# Altium PCB PCI_ASTROPIX_carrier_Bondplan.PcbDoc (part 2 of 2)
Units mm, origin at the board's own origin, x right, y up, seen from the top; angles counter-clockwise.
Board outline 51.3 x 59.63 mm, 4 copper layers (Top Layer, gnd, HV_vss, Bottom Layer); 70 components, 63 nets, 532 pads, 96 vias.
Unrouted connection lines stored in the file: 4.
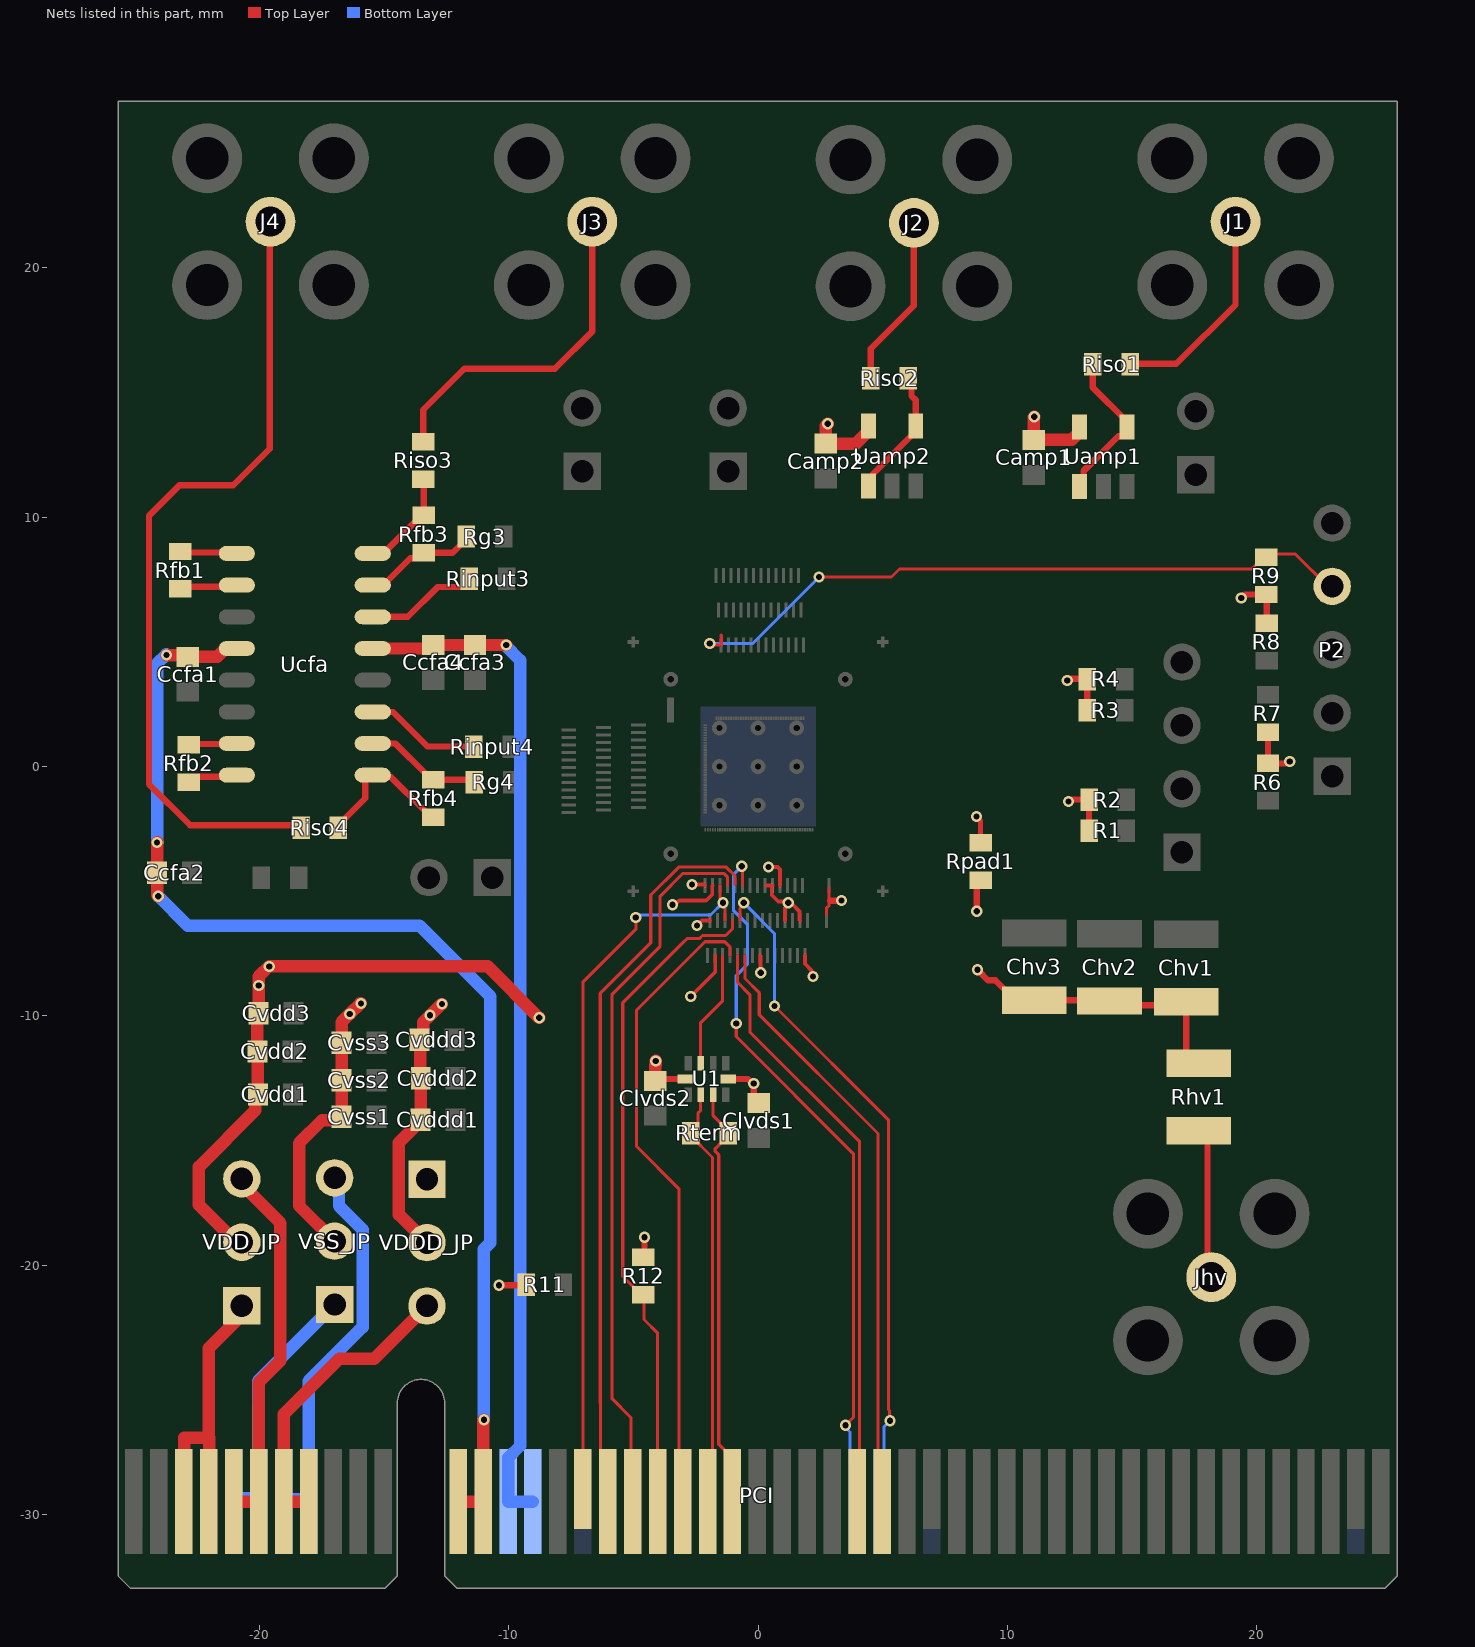
[diagram p4: the nets of this part, all layers, seen from the top]

## Via types
v1: diameter 0.45, hole 0.25, Top Layer to Bottom Layer, 90 vias
v2: diameter 3.1, hole 3.1, Top Layer to Bottom Layer, 4 vias
v3: diameter 2, hole 2, Top Layer to Bottom Layer, 2 vias

## Nets (pads, with @x,y where several pads share a name; then routed paths per layer and width w, separated by ;. In a path a pad name is that pad's centre, name@x,y a point inside that pad or via, vN(x,y) a via of type N, cw(c..) or ccw(c..) an arc to the next point about the centre after c; other vN are vias at no path point) (continued)
NetAstropix_chip_114: P2.4 R9.1 | length 27.9
  Top Layer w0.125: v1(-1.937,4.93) -1.772,4.93 -1.712,4.87 -1.48,4.87 ; -1.475,4.85 -1.475,5.275 ; v1(2.45,7.6) 5.35,7.6 5.675,7.925 19.8,7.925 R9.1@20.3,8.425 ; R9.1@20.35,8.425 20.45,8.525 21.55,8.525 22.85,7.225 P2.4@23.025,7.225
  Bottom Layer w0.125: v1@-1.925,4.975 -1.88,4.93 -0.22,4.93 v1(2.45,7.6)
NetAstropix_chip_201: Rpad1.2 | length 1.1
  Top Layer w0.125: v1(8.765,-2.007) 8.925,-2.167
  Top Layer w0.2: Rpad1.2@8.925,-3.05 8.925,-2.167
NetJ1_1: J1.1 Riso1.2 | length 8.5
  Top Layer w0.254: Riso1.2@14.925,16.125 14.95,16.15 16.775,16.15 19.15,18.525 19.15,21.75 J1.1@19.15,21.85
NetJ2_1: J2.1 Riso2.2 | length 6.7
  Top Layer w0.254: Riso2.2@4.525,15.575 4.525,16.75 6.25,18.475 6.25,21.225 J2.1@6.475,21.45
NetJ3_1: J3.1 Riso3.2 | length 13.7
  Top Layer w0.25: Riso3.2@-13.425,13.025 -13.425,14.3 -11.775,15.95 -8.146,15.95 -6.65,17.446 J3.1@-6.65,21.775
NetJ4_1: J4.1 Riso4.2 | length 32.8
  Top Layer w0.254: J4.1@-19.575,21.975 -19.575,12.75 -21.05,11.275 -23.2,11.275 -24.425,10.05 -24.425,-0.7 -22.775,-2.35 -18.425,-2.35 Riso4.2@-18.325,-2.45
NetJhv_1: Jhv.1 Rhv1.2 | length 6.2
  Top Layer w0.254: Rhv1.2@17.702,-14.55 Rhv1.2@18.063,-14.911 ; Rhv1.2@17.727,-14.6 Rhv1.2@17.675,-14.6 18.025,-14.95 Jhv.1@18.025,-20.1
NetRfb1_1: Rfb1.1 Ucfa.1 | length 2.2
  Top Layer w0.25: Rfb1.1@-23.175,8.625 -23.135,8.585 -21.21,8.585 Ucfa.1@-21.05,8.425
NetRfb1_2: Rfb1.2 Ucfa.2 | length 2.3
  Top Layer w0.25: Rfb1.2@-23.175,7.125 -23.092,7.208 -20.967,7.208 Ucfa.2@-20.9,7.275
NetRfb2_1: Rfb2.1 Ucfa.8 | length 2
  Top Layer w0.25: Rfb2.1@-22.825,-0.625 -22.612,-0.412 -20.912,-0.412 Ucfa.8@-20.9,-0.4
NetRfb2_2: Rfb2.2 Ucfa.7 | length 1.8
  Top Layer w0.25: Rfb2.2@-22.825,0.875 -22.8,0.9 -21.075,0.9 Ucfa.7@-21.025,0.95
NetRfb3_1: Rfb3.1 Rg3.2 Ucfa.15 | length 4.7
  Top Layer w0.25: Ucfa.15@-15.45,7.275 -15.025,7.275 -13.95,8.35 -13.7,8.35 Rfb3.1@-13.425,8.625 ; Rfb3.1@-13.4,8.575 -12.25,8.575 -11.675,9.15 Rg3.2@-11.675,9.325
NetRfb3_2: Rfb3.2 Riso3.1 Ucfa.16 | length 4.2
  Top Layer w0.25: Ucfa.16@-15.45,8.545 -15.03,8.545 -13.475,10.1 Rfb3.2@-13.4,10.1 ; Riso3.1@-13.425,11.575 -13.4,11.55 Rfb3.2@-13.4,10.1 ; Rfb3.2@-13.4,10.075 Rfb3.2@-13.4,10.1
NetRfb4_1: Rfb4.1 Riso4.1 Ucfa.9 | length 5.9
  Top Layer w0.25: Riso4.1@-16.825,-2.45 -16.825,-2.35 -15.75,-1.275 -15.75,-0.507 -15.618,-0.375 Ucfa.9@-15.45,-0.375 ; Ucfa.9@-15.45,-0.345 -15.383,-0.412 -14.738,-0.412 -13.35,-1.8 -13.125,-2.025 Rfb4.1@-13.025,-2.025
NetRfb4_2: Rfb4.2 Rg4.2 Ucfa.10 | length 4.7
  Top Layer w0.25: Ucfa.10@-15.45,0.925 -14.55,0.925 -13.35,-0.275 -13.35,-0.3 -13.125,-0.525 Rfb4.2@-13.1,-0.525 ; Rfb4.2@-13.025,-0.525 -11.425,-0.525 Rg4.2@-11.35,-0.6
NetRinput3_2: Rinput3.2 Ucfa.14 | length 4.6
  Top Layer w0.25: Ucfa.14@-15.45,6.005 -14.045,6.005 -12.85,7.2 -11.8,7.2 -11.525,7.475 Rinput3.2@-11.525,7.575
NetRinput4_2: Rinput4.2 Ucfa.11 | length 4.6
  Top Layer w0.25: Ucfa.11@-15.45,2.195 -15.439,2.184 -14.634,2.184 -13.25,0.8 Rinput4.2@-11.4,0.8
NetRiso1_1: Riso1.1 Uamp1.1 Uamp1.4 | length 6.6
  Top Layer w0.254: Uamp1.1@12.9,11.225 13.051,11.376 13.051,11.851 14.452,13.252 14.627,13.252 14.9,13.525 Uamp1.4@14.9,13.7 ; Riso1.1@13.475,16.225 13.425,16.175 Riso1.1@13.425,16.125 13.425,15.2 14.8,13.825 Uamp1.4@14.8,13.625
NetRiso2_1: Riso2.1 Uamp2.1 Uamp2.4 | length 5.5
  Top Layer w0.254: Uamp2.1@4.45,10.975 4.598,11.123 4.598,11.723 6.325,13.45 Uamp2.4@6.325,13.65 6.325,14.7 6.152,14.873 6.152,15.348 Riso2.1@5.925,15.575
POW4: PCI.B5 PCI.B6 VDD_JP.3 | length 14.6
  Top Layer w0.5: PCI.B5@-21,-29.475 PCI.B6@-20.025,-29.475 ; VDD_JP.3@-20.575,-16.775 -20.575,-16.885 -19.15,-18.31 -19.15,-23.825 -20.025,-24.7 PCI.B6@-20.025,-29.446
POW5: PCI.A7 PCI.A8 VSS_JP.3 | length 15.3
  Bottom Layer w0.5: PCI.A7@-19.025,-29.475 -18.925,-29.375 PCI.A8@-18.025,-29.375 ; PCI.A8@-17.975,-29.375 PCI.A8@-18.025,-29.375 ; VSS_JP.3@-16.979,-16.492 -16.803,-16.668 -16.803,-17.617 -15.854,-18.566 -15.854,-22.477 -18.025,-24.648 PCI.A8@-18.025,-29.375
POW6: PCI.B7 PCI.B8 VDDD_JP.3 | length 12
  Top Layer w0.5: PCI.B7@-19.025,-29.475 -18.075,-29.475 PCI.B8@-18.025,-29.425 ; PCI.B7@-19.015,-29.456 -19.015,-25.965 -16.8,-23.75 -15.395,-23.75 VDDD_JP.3@-13.275,-21.63
res_n: PCI.B17 | length 29.2
  Top Layer w0.125: PCI.B17@-7.025,-29.025 -7.025,-8.65 -4.9,-6.525 v1(-4.9,-6.05) ; v1@-1.52,-5.494 -1.325,-5.689 -1.325,-6.175 ; v1@-1.52,-5.465 v1@-1.52,-5.427 ; -1.52,-4.77 v1@-1.52,-5.427 ; v1(-1.4,-5.461) -1.434,-5.427 v1@-1.52,-5.427
  Bottom Layer w0.125: v1(-4.9,-6.05) -4.812,-6.05 -4.712,-5.95 -1.903,-5.95 -1.414,-5.461 v1(-1.4,-5.461)
SAMPLE_CLK: U1.8 | length 4.6
  Top Layer w0.125: U1.8@-2.3,-11.85 -2.3,-10.275 -1.42,-9.395 -1.42,-7.57
SAMPLE_CLK_N: PCI.B23 Rterm.1 U1.3 | length 17.1
  Top Layer w0.1: PCI.B23@-1.025,-29.475 PCI.B23@-1.025,-27.725
  Top Layer w0.125: U1.3@-1.8,-13.16 -1.8,-14 -1.2,-14.6 Rterm.1@-1.2,-14.7 -1.2,-14.8 -1.721,-15.321 -1.721,-15.425 -1.575,-15.571 -1.575,-27.175 PCI.B23@-1.025,-27.725
SAMPLE_CLK_P: PCI.B22 Rterm.2 U1.2 | length 17.4
  Top Layer w0.1: U1.2@-2.3,-13.325 U1.2@-2.3,-13.16
  Top Layer w0.125: U1.2@-2.3,-13.325 -2.3,-13.794 -2.413,-13.906 -2.413,-14.413 Rterm.2@-2.7,-14.7 -2.7,-14.8 -1.825,-15.675 -1.825,-29.275 PCI.B22@-2.025,-29.475 ; PCI.B22@-2.138,-28.917 PCI.B22@-1.802,-29.252
SPI_CLK: PCI.B18 | length 28.9
  Top Layer w0.125: PCI.B18@-5.925,-28.75 -6.313,-28.362 -6.313,-25.541 -6.325,-25.529 -6.325,-9.095 -4.3,-7.07 -4.3,-5.15 -3.182,-4.032 -1.276,-4.032 -0.92,-4.389 -0.92,-4.725
SPI_CSN: PCI.B20 R12.1 | length 26.4
  Top Layer w0.125: R12.1@-4.85,-21.1 -4.85,-21.025 -5.425,-20.45 -5.425,-9.475 -3.032,-7.082 -2.85,-6.9 -2.354,-6.9 -2.229,-6.775 -1.297,-6.775 -1.025,-6.503 -1.025,-6.449 -1.02,-6.444 -1.02,-6.17 ; R12.1@-4.6,-21.175 -4.575,-21.2 -4.575,-22.175 -4.025,-22.725 PCI.B20@-4.025,-29.475
SPI_MISO: PCI.B19 | length 28
  Top Layer w0.125: PCI.B19@-5.1,-28.575 -5.1,-26.1 -5.85,-25.35 -5.85,-9.125 -3.925,-7.2 -3.925,-5.2 -3.007,-4.282 -1.38,-4.282 -1.22,-4.442 -1.22,-4.77
SPI_MOSI: PCI.B21 | length 25.8
  Top Layer w0.125: PCI.B21@-3.025,-29.475 -3.175,-29.325 -3.175,-16.925 -4.875,-15.225 -4.875,-9.775 -2.125,-7.025 -1.337,-7.025 -1.12,-7.242 -1.12,-7.57
SR_CK1: PCI.B28 | length 23
  Top Layer w0.125: -0.825,-7.55 -0.825,-8.65 -0.325,-9.15 -0.325,-10.642 4.075,-15.042 4.075,-28.525 PCI.B28@4.05,-28.55
SR_CK2: PCI.A29 | length 26
  Top Layer w0.125: -0.72,-6.17 -0.72,-5.688 -0.575,-5.543 v1(-0.575,-5.465) ; v1(0.663,-9.6) 5.225,-14.163 5.225,-25.775 5.272,-25.822 5.272,-26.218 v1(5.288,-26.234)
  Bottom Layer w0.125: v1(-0.575,-5.465) 0.663,-6.703 v1(0.663,-9.6) ; PCI.A29@5.05,-28.2 5.05,-26.472 v1(5.288,-26.234)
SR_LOAD: PCI.A28 | length 27.9
  Top Layer w0.125: v1(-0.875,-10.3) -0.875,-10.825 3.825,-15.525 3.825,-26.101 v1(3.509,-26.416) ; v1(-0.65,-4) -0.625,-4.025 -0.625,-4.775
  Bottom Layer w0.125: v1(-0.875,-10.3) -0.875,-8.39 -0.425,-7.94 -0.425,-6.326 -0.988,-5.764 -0.988,-4.338 v1(-0.65,-4) ; v1(3.509,-26.416) 3.509,-26.504 3.688,-26.683 3.688,-27.938 PCI.A28@4.05,-28.3
SR_RB: 
SR_SIN: PCI.B29 | length 22.8
  Top Layer w0.125: -0.525,-7.575 -0.525,-8.5 0.05,-9.075 0.05,-9.95 4.812,-14.712 4.812,-27.812 PCI.B29@5.05,-28.05
SR_SOUT: 
sub_board: Chv1.2 Chv2.2 Chv3.2 Rhv1.1 Rpad1.1 | length 13.6
  Top Layer w0.125: 2.74,-5.933 2.74,-5.683 2.853,-5.569 2.853,-5.375 ; 2.85,-5.375 2.853,-5.375 ; 2.85,-4.863 2.853,-4.866 2.853,-5.375
  Top Layer w0.254: 2.9,-5.375 v1(3.35,-5.375) ; v1(8.775,-5.8) 8.775,-4.6 Rpad1.1@8.95,-4.425 ; v1@8.85,-8.125 8.85,-8.2 9.22,-8.57 9.52,-8.57 10.325,-9.375 Chv3.2@11.075,-9.375 Chv2.2@13.525,-9.375 ; Chv2.2@14.075,-9.575 16.8,-9.575 17.175,-9.95 17.175,-11.477 17.523,-11.825 Rhv1.1@17.575,-11.825
  Bottom Layer w0.254: v1(3.35,-5.375) v1@3.403,-5.375
  other v1: 8.8,-8.15
vcfa_neg: Ccfa3.2 Ccfa4.2 PCI.A14 PCI.A15 Ucfa.13 | length 41.3
  Top Layer w0.25: Ccfa4.2@-13.265,4.735 Ccfa4.2@-13.1,4.9 ; Ccfa3.2@-11.35,4.875 -11.3,4.875 Ccfa3.2@-11.225,4.95
  Top Layer w0.5: Ucfa.13@-15.45,4.735 Ccfa4.2@-13.265,4.735 ; Ccfa4.2@-13.025,4.875 Ccfa3.2@-11.35,4.875 ; Ccfa3.2@-11.3,4.875 v1(-10.1,4.875)
  Bottom Layer w0.5: v1@-10.125,4.85 -9.535,4.26 -9.535,-27.235 -10.025,-27.725 PCI.A14@-10.025,-29.475 ; PCI.A14@-10.025,-29.375 -9.925,-29.475 PCI.A15@-9.025,-29.475
vcfa_pos: Ccfa1.2 Ccfa2.2 PCI.B12 PCI.B13 Ucfa.4 | length 49.6
  Top Layer w0.25: Ccfa1.2@-22.922,4.472 Ccfa1.2@-22.875,4.425 ; Ucfa.4@-21.1,4.75 Ucfa.4@-21.025,4.825 ; Ucfa.4@-21.075,4.735 -21.015,4.735 Ucfa.4@-21,4.75
  Top Layer w0.5: v1@-24.1,-3.025 v1(-24.1,-3.05) Ccfa2.2@-24.1,-4.25 -24.1,-5.15 v1(-24.05,-5.2) ; v1(-23.72,4.472) -22.922,4.472 -22.878,4.472 Ccfa1.2@-22.85,4.5 ; Ccfa1.2@-22.875,4.4 -21.687,4.4 -21.337,4.75 -21.1,4.75 -21,4.75 Ucfa.4@-20.85,4.75 ; PCI.B12@-12.025,-29.475 -11.1,-29.475 PCI.B13@-11.025,-29.4 ; PCI.B13@-11.025,-29.475 -11.025,-26.23 v1(-10.99,-26.194)
  Bottom Layer w0.5: v1(-24.1,-3.05) -24.1,4.125 v1@-23.725,4.5 ; v1(-24.05,-5.2) -22.875,-6.375 -13.575,-6.375 -10.73,-9.22 -10.73,-19.093 -10.99,-19.353 v1(-10.99,-26.194)
VDD18: PCI.B3 PCI.B4 VDD_JP.1 | length 11.4
  Top Layer w0.5: PCI.B3@-23.015,-29.456 -23.015,-26.916 -22.015,-26.916 ; PCI.B4@-22.015,-29.456 -22.015,-26.916 ; VDD_JP.1@-20.825,-22.115 -20.825,-22.125 -22.025,-23.325 -22.025,-26.906 -22.015,-26.916
  Bottom Layer w0.5: VDD_JP.1@-20.347,-22.072 VDD_JP.1@-20.344,-22.072
vdd_board: Camp1.2 Camp2.2 Cvdd1.2 Cvdd2.2 Cvdd3.2 Uamp1.5 Uamp2.5 VDD_JP.2 VDDD_JP.1 | length 35.2
  Top Layer w0.15: v1(-2.45,-6.375) -2.245,-6.17 -1.92,-6.17 ; 0.325,-4.77 0.58,-4.77 ; 0.55,-4.775 0.55,-5.15 0.808,-5.408 1.153,-5.408 v1(1.21,-5.465) v1@1.225,-5.48 ; 1.08,-6.17 1.08,-5.676 1.225,-5.531 v1@1.225,-5.48 ; v1@1.225,-5.425 v1@1.225,-5.48 ; 1.68,-6.17 1.668,-6.158 1.668,-5.812 1.378,-5.522 1.267,-5.522 v1@1.225,-5.48
  Top Layer w0.5: VDD_JP.2@-20.7,-19.3 -22.425,-17.575 -22.425,-16.05 -20.165,-13.79 -20.165,-13.265 Cvdd1.2@-20.05,-13.15 -20.062,-13.137 Cvdd2.2@-20.062,-11.338 ; Cvdd2.2@-20.075,-11.325 Cvdd3.2@-20.075,-9.725 ; Cvdd3.2@-20.025,-9.9 v1(-20.025,-8.775) -20.025,-8.425 v1@-19.6,-8 ; v1(-19.601,-8.016) -10.834,-8.016 v1(-8.775,-10.075) ; v1(2.8,13.75) 2.725,13.675 Camp2.2@2.725,12.95 3.925,12.95 4.45,13.475 Uamp2.5@4.45,13.775 ; v1(11.075,14.025) 11.05,14 Camp1.2@11.05,13.1 12.575,13.1 12.875,13.4 Uamp1.5@12.875,13.8
vddd_board: Clvds1.2 Clvds2.2 Cvddd1.2 Cvddd2.2 Cvddd3.2 R1.2 R2.2 R3.2 R4.2 R6.2 R7.2 R8.2 R9.2 R11.2 R12.2 U1.5 U1.10 VDDD_JP.2 | length 30
  Top Layer w0.15: v1(-3.427,-5.537) -3.322,-5.537 -3.16,-5.375 -2.375,-5.375 -2.368,-5.368 -2.072,-5.368 -1.832,-5.128 -1.832,-4.782 -1.82,-4.77 ; v1(-2.7,-9.225) -1.72,-8.245 -1.72,-7.57
  Top Layer w0.25: v1(-10.39,-20.8) -9.325,-20.8 R11.2@-9.3,-20.775 ; R12.2@-4.6,-19.675 -4.55,-19.625 v1(-4.55,-18.875) ; Clvds2.2@-4.2,-12.475 -4.15,-12.525 -4.125,-12.525 U1.10@-2.91,-12.525 ; U1.5@-1.225,-12.525 U1.5@-1.19,-12.525 -0.409,-12.525 -0.229,-12.705 v1(-0.175,-12.705) -0.175,-13.325 Clvds1.2@0,-13.5 ; v1(12.4,3.45) 12.454,3.45 12.529,3.525 R4.2@13.2,3.525 ; v1(12.449,-1.397) 12.521,-1.325 R2.2@13.275,-1.325 ; R4.2@13.175,3.525 R4.2@13.2,3.5 R3.2@13.2,2.25 ; R1.2@13.275,-2.575 R2.2@13.275,-1.35 ; v1(19.374,6.755) 19.518,6.9 R9.2@20.375,6.9 ; R8.2@20.313,5.837 R8.2@20.4,5.75 20.4,6.975 R9.2@20.375,7 ; R7.2@20.425,1.4 R7.2@20.45,1.375 R6.2@20.45,0.125 21.196,0.125 21.271,0.2 v1(21.325,0.2)
  Top Layer w0.5: Cvddd3.2@-13.725,-10.75 -13.575,-10.9 Cvddd3.2@-13.575,-10.95 -13.425,-10.8 -13.425,-10.25 v1(-13.15,-9.975) -12.7,-9.525 v1(-12.675,-9.525) ; Cvddd3.2@-13.612,-10.988 -13.55,-11.05 -13.55,-12.475 Cvddd2.2@-13.532,-12.493 ; Cvddd1.2@-13.538,-14.171 -13.532,-14.165 Cvddd2.2@-13.532,-12.493 ; Cvddd1.2@-13.525,-14.165 -13.525,-14.208 -14.4,-15.083 -14.4,-17.965 VDDD_JP.2@-13.275,-19.09 ; Cvddd2.2@-13.525,-12.5 Cvddd2.2@-13.532,-12.493 ; Clvds2.2@-4.125,-12.525 -4.125,-11.975 -4.1,-11.95 v1(-4.1,-11.805)
vss_board: Cvss1.2 Cvss2.2 Cvss3.2 VSS_JP.2 | length 15
  Top Layer w0.154: v1(-2.65,-4.725) -2.134,-4.725 -2.134,-4.756 -2.12,-4.77 ; 0.08,-7.57 0.094,-7.584 0.094,-8.251 v1(0.112,-8.269) ; v1(0.425,-4.025) 0.783,-4.025 0.88,-4.122 0.88,-4.77 ; 1.88,-7.57 1.88,-7.905 2.149,-8.174 2.149,-8.363 v1(2.206,-8.419)
  Top Layer w0.5: VSS_JP.2@-16.979,-19.032 -18.4,-17.611 -18.4,-15.1 -17.475,-14.175 -16.85,-14.175 Cvss1.2@-16.7,-14.025 ; Cvss1.2@-16.7,-14.05 Cvss1.2@-16.7,-14.025 ; v1(-15.924,-9.499) -15.949,-9.499 v1(-16.375,-9.925) -16.7,-10.25 Cvss3.2@-16.7,-11.075 Cvss2.2@-16.7,-12.575 Cvss1.2@-16.7,-14.025
VSSA: PCI.A5 PCI.A6 VSS_JP.1 | length 10.3
  Bottom Layer w0.5: PCI.A5@-21.025,-29.475 -21.025,-29.45 -20.925,-29.35 PCI.A6@-20.015,-29.35 ; -20.05,-25.525 -20.05,-24.643 VSS_JP.1@-16.979,-21.572 ; -20.015,-25.415 PCI.A6@-20.015,-29.35 ; PCI.A6@-19.975,-29.35 PCI.A6@-20.015,-29.35
pads on no net: Astropix_chip.1 Astropix_chip.2 Astropix_chip.3 Astropix_chip.4 Astropix_chip.5 Astropix_chip.6 Astropix_chip.7 Astropix_chip.8 Astropix_chip.9 Astropix_chip.10 Astropix_chip.11 Astropix_chip.12 Astropix_chip.13 Astropix_chip.14 Astropix_chip.15 Astropix_chip.16 Astropix_chip.17 Astropix_chip.18 Astropix_chip.19 Astropix_chip.20 Astropix_chip.21 Astropix_chip.22 Astropix_chip.23 Astropix_chip.24 Astropix_chip.25 Astropix_chip.26 Astropix_chip.27 Astropix_chip.28 Astropix_chip.29 Astropix_chip.30 Astropix_chip.31 Astropix_chip.32 Astropix_chip.33 Astropix_chip.34 Astropix_chip.35 Astropix_chip.36 Astropix_chip.37 Astropix_chip.38 Astropix_chip.39 Astropix_chip.40 Astropix_chip.41 Astropix_chip.42 Astropix_chip.43 Astropix_chip.44 Astropix_chip.45 Astropix_chip.46 Astropix_chip.47 Astropix_chip.48 Astropix_chip.49 Astropix_chip.50 Astropix_chip.51 Astropix_chip.52 Astropix_chip.53 Astropix_chip.54 Astropix_chip.55 Astropix_chip.56 Astropix_chip.57 Astropix_chip.58 Astropix_chip.59 Astropix_chip.60 Astropix_chip.61 Astropix_chip.62 Astropix_chip.63 Astropix_chip.64 Astropix_chip.65 Astropix_chip.66 Astropix_chip.67 Astropix_chip.68 Astropix_chip.69 Astropix_chip.70 Astropix_chip.71 Astropix_chip.72 Astropix_chip.73 Astropix_chip.74 Astropix_chip.75 Astropix_chip.76 Astropix_chip.77 Astropix_chip.78 Astropix_chip.79 Astropix_chip.80 Astropix_chip.81 Astropix_chip.82 Astropix_chip.83 Astropix_chip.84 Astropix_chip.85 Astropix_chip.86 Astropix_chip.87 Astropix_chip.88 Astropix_chip.89 Astropix_chip.90 Astropix_chip.91 Astropix_chip.92 Astropix_chip.93 Astropix_chip.94 Astropix_chip.95 Astropix_chip.96 Astropix_chip.97 Astropix_chip.98 Astropix_chip.99 Astropix_chip.100 Astropix_chip.101 Astropix_chip.102 Astropix_chip.103 Astropix_chip.104 Astropix_chip.105 Astropix_chip.106 Astropix_chip.107 Astropix_chip.108 Astropix_chip.109 Astropix_chip.110 Astropix_chip.111 Astropix_chip.112 Astropix_chip.113 Astropix_chip.114 Astropix_chip.115 Astropix_chip.116 Astropix_chip.201 Astropix_chip.202 Astropix_chip.NC Astropix_chip.p PCI.A1 PCI.A2 PCI.A3 PCI.A4 PCI.A9 PCI.A10 PCI.A12 PCI.A13 PCI.A17 PCI.A18 PCI.A19 PCI.A20 PCI.A21 PCI.A22 PCI.A23 PCI.A24 PCI.A25 PCI.A26 PCI.A27 PCI.A30 PCI.A31 PCI.A32 PCI.A33 PCI.A34 PCI.A35 PCI.A36 PCI.A37 PCI.A38 PCI.A39 PCI.A40 PCI.A41 PCI.A42 PCI.A43 PCI.A44 PCI.A45 PCI.A46 PCI.A47 PCI.A48 PCI.A49 PCI.B1 PCI.B2 PCI.B9 PCI.B10 PCI.B14 PCI.B15 PCI.B24 PCI.B25 PCI.B26 PCI.B27 PCI.B30 PCI.B31 PCI.B37 PCI.B38 PCI.B39 PCI.B40 PCI.B41 PCI.B42 PCI.B43 PCI.B44 PCI.B45 PCI.B46 PCI.B47 PCI.B48 PCI.B49 U1.4 U1.6 U1.9
copper on no net: | length 0.1
  Top Layer w0.254: -16.05,-29.45 -16.025,-29.475 ; -10.025,-29.475 -9.975,-29.425
  other v2: -23,-13 22,-13 -23,14 22,14
  other v3: 6.425,-3.925 -6.9,4.65

## Polygon pours and split planes (outlines as drawn)
gnd on gnd (split plane): 25.125,-20.206 25.125,-32.245 24.924,-32.446 -11.854,-32.446 -12.055,-32.245 -12.055,-25.527 -12.055,-25.523 -12.064,-25.363 -12.091,-25.202 -12.137,-25.045 -12.199,-24.893 -12.279,-24.75 -12.373,-24.617 -12.482,-24.494 -12.605,-24.385 -12.738,-24.291 -12.881,-24.211 -13.033,-24.149 -13.19,-24.103 -13.352,-24.076 -13.515,-24.067 -13.679,-24.076 -13.84,-24.103 -13.997,-24.149 -14.149,-24.211 -14.292,-24.291 -14.425,-24.385 -14.548,-24.494 -14.657,-24.617 -14.751,-24.75 -14.831,-24.893 -14.893,-25.045 -14.939,-25.202 -14.966,-25.363 -14.975,-25.523 -14.975,-25.527 -14.975,-32.245 -15.176,-32.446 -24.954,-32.446 -25.155,-32.245 -25.155,-22.031 -25.155,26.165 25.125,26.165
vdd_board on HV_vss (split plane): 25.125,10.227 14.875,10.227 14.836,10.219 14.803,10.197 14.408,9.802 14.3,9.802 14.261,9.794 14.228,9.772 14.206,9.739 14.198,9.7 14.199,9.694 8.801,4.295 8.75,4.302 3.375,4.302 3.323,4.295 3.274,4.275 3.232,4.243 3.2,4.201 3.18,4.152 3.173,4.1 3.175,4.085 2.566,3.477 -3.05,3.477 -3.102,3.47 -3.151,3.45 -3.193,3.418 -3.198,3.411 -3.205,3.405 -3.318,3.293 -3.35,3.251 -3.37,3.202 -3.377,3.15 -3.377,-3.241 -3.968,-3.832 -4,-3.874 -4.01,-3.898 -4.65,-3.898 -4.689,-3.906 -4.722,-3.928 -5.097,-4.302 -5.114,-4.306 -5.147,-4.328 -7.842,-7.023 -11.889,-7.023 -11.903,-7.003 -11.936,-6.981 -11.975,-6.973 -14.25,-6.973 -14.289,-6.981 -14.322,-7.003 -17.222,-9.903 -17.244,-9.936 -17.252,-9.975 -17.252,-11.275 -17.244,-11.314 -17.222,-11.347 -17.026,-11.544 -17.027,-11.55 -17.019,-11.589 -16.997,-11.622 -16.964,-11.644 -16.925,-11.652 -15.052,-11.652 -15.052,-15.35 -15.044,-15.389 -15.022,-15.422 -14.989,-15.444 -14.95,-15.452 -14.911,-15.444 -14.885,-15.427 -12.34,-15.427 -12.314,-15.444 -12.275,-15.452 -12.15,-15.452 -12.144,-15.451 -11.902,-15.692 -11.902,-16.983 -12.992,-18.073 -14.65,-18.073 -14.689,-18.081 -14.722,-18.103 -14.732,-18.118 -14.747,-18.128 -21.672,-25.053 -21.694,-25.086 -21.702,-25.125 -21.702,-32.446 -24.954,-32.446 -25.155,-32.245 -25.155,-22.173 -25.153,-22.172 -25.131,-22.139 -25.123,-22.1 -25.123,-18.325 -25.131,-18.286 -25.153,-18.253 -25.155,-18.252 -25.155,26.165 25.125,26.165
vss_board on HV_vss (split plane): -2.923,-3.627 -2.169,-3.627 -2.159,-3.625 -2.15,-3.627 1.825,-3.627 1.941,-3.676 2.557,-4.293 2.598,-4.324 2.598,-4.425 2.606,-4.464 2.628,-4.497 2.661,-4.519 2.698,-4.527 2.698,-6.9 2.705,-6.952 2.725,-7.001 2.757,-7.043 2.799,-7.075 2.848,-7.095 2.9,-7.102 2.951,-7.095 2.965,-7.11 2.998,-7.131 2.998,-8.633 2.708,-8.923 -0.573,-8.923 -0.573,-8.217 1.822,-5.822 1.844,-5.789 1.852,-5.75 1.852,-5.2 1.844,-5.161 1.822,-5.128 1.372,-4.678 1.339,-4.656 1.3,-4.648 0.55,-4.648 0.511,-4.656 0.478,-4.678 -0.667,-5.823 -1.708,-5.823 -2.328,-5.203 -2.361,-5.181 -2.4,-5.173 -2.625,-5.173 -2.664,-5.181 -2.697,-5.203 -2.708,-5.219 -2.736,-5.2 -2.775,-5.192 -2.787,-5.194 -2.984,-4.997 -3.103,-4.878 -3.136,-4.856 -3.175,-4.848 -3.65,-4.848 -3.689,-4.856 -3.722,-4.878 -4.472,-5.628 -4.494,-5.661 -4.502,-5.7 -4.502,-5.925 -4.502,-6.15 -4.502,-6.683 -6.267,-8.448 -9.785,-8.448 -9.811,-8.431 -9.85,-8.423 -12.375,-8.423 -12.4,-8.428 -12.425,-8.423 -12.464,-8.431 -12.497,-8.453 -15.492,-11.448 -16.833,-11.448 -17.048,-11.233 -17.048,-10.017 -14.208,-7.177 -12.161,-7.177 -12.147,-7.197 -12.114,-7.219 -12.075,-7.227 -7.8,-7.227 -7.761,-7.219 -7.728,-7.197 -5.028,-4.498 -5.011,-4.494 -4.978,-4.472 -4.608,-4.102 -3.98,-4.102 -3.968,-4.118 -3.926,-4.15 -3.877,-4.17 -3.825,-4.177 -3.773,-4.17 -3.724,-4.15 -3.682,-4.118 -3.667,-4.102 -3.498,-4.102 -3.459,-4.094 -3.426,-4.072 -3.175,-3.821 -2.974,-3.62
vddd_board on HV_vss (split plane): 197 vertices, not listed, extent -21.498,-32.446 25.125,10.023
vdd_board on HV_vss (split plane): 1.648,-5.242 1.648,-5.708 -0.747,-8.103 -0.769,-8.136 -0.777,-8.175 -0.777,-9.025 -0.771,-9.057 -0.782,-9.073 -0.789,-9.112 -0.782,-9.152 -0.76,-9.185 -0.752,-9.192 -0.752,-9.339 -0.772,-9.353 -1.472,-10.052 -1.489,-10.056 -1.522,-10.078 -1.544,-10.111 -1.552,-10.15 -1.551,-10.156 -2.192,-10.798 -6.975,-10.798 -7.014,-10.806 -7.047,-10.828 -7.517,-11.298 -9.375,-11.298 -9.381,-11.299 -9.973,-10.708 -9.973,-10.092 -9.458,-9.577 -3.867,-9.577 -3.372,-10.072 -3.339,-10.094 -3.3,-10.102 -2.55,-10.102 -2.511,-10.094 -2.478,-10.072 -1.853,-9.447 -1.831,-9.414 -1.823,-9.375 -1.823,-9.175 -1.831,-9.136 -1.853,-9.103 -2.873,-8.083 -2.873,-6.192 -2.653,-5.972 -2.628,-5.947 -2.606,-5.914 -2.598,-5.875 -2.598,-5.425 -2.606,-5.386 -2.612,-5.377 -2.442,-5.377 -1.822,-5.997 -1.789,-6.019 -1.75,-6.027 -0.625,-6.027 -0.586,-6.019 -0.553,-5.997 0.592,-4.852 1.258,-4.852
NetAstropix_chip_201 on HV_vss (split plane): 8.523,0.05 8.53,-0.002 8.55,-0.051 8.582,-0.093 8.624,-0.125 8.673,-0.145 8.715,-0.15 9.348,-0.784 9.348,-3.916 9.148,-4.117 9.126,-4.1 9.077,-4.08 9.025,-4.073 2.9,-4.073 2.885,-4.075 2.875,-4.049 2.843,-4.007 2.199,-3.364 2.189,-3.356 2.181,-3.348 2.169,-3.34 2.157,-3.332 2.146,-3.327 2.136,-3.321 1.946,-3.24 1.932,-3.236 1.919,-3.23 1.907,-3.229 1.895,-3.225 1.881,-3.225 1.867,-3.223 -2.15,-3.223 -2.159,-3.225 -2.169,-3.223 -2.923,-3.223 -2.973,-3.23 -2.973,3.066 -2.966,3.073 2.65,3.073 2.702,3.08 2.751,3.1 2.793,3.132 3.493,3.832 3.525,3.874 3.535,3.898 8.523,3.898
sub_board on HV_vss (split plane): 9.848,-5.384 9.848,-8.291 9.541,-8.598 8.434,-8.598 5.918,-6.082 5.876,-6.05 5.827,-6.03 5.775,-6.023 3.825,-6.023 3.773,-6.03 3.724,-6.05 3.682,-6.082 3.102,-6.663 3.102,-4.477 8.941,-4.477

## Other copper
HV_vss (plane layer: these items are gaps in the copper):
  lines w0.2: -25.225,-22.1 -25.225,-18.325 ; -21.6,-32.75 -21.6,-25.125 -14.675,-18.2 ; -16.925,-11.55 -14.875,-11.55 ; -14.95,-15.35 -14.95,-11.575 ; -14.925,-15.325 -12.3,-15.325 -12.275,-15.35 -12.15,-15.35 ; -14.65,-18.175 -12.95,-18.175 -11.8,-17.025 -11.8,-15.65 -12.15,-15.3 ; -12.425,-8.525 -15.45,-11.55 -16.875,-11.55 -17.15,-11.275 -17.15,-9.975 -14.25,-7.075 -11.975,-7.075 ; -12.375,-8.525 -9.85,-8.525 ; -12.075,-7.125 -7.8,-7.125 -5.075,-4.4 -5.05,-4.4 -4.65,-4 -3.498,-4 -3.247,-3.748 -2.923,-3.425 ; -9.85,-8.55 -6.225,-8.55 -4.4,-6.725 -4.4,-5.925 ; -4.4,-6.15 -4.4,-5.7 -3.65,-4.95 -3.175,-4.95 -3.056,-5.069 -2.819,-5.306 -2.7,-5.425 -2.7,-5.875 -2.775,-5.95 ; -2.825,-10 -2.55,-10 -1.925,-9.375 -1.925,-9.175 -2.975,-8.125 -2.975,-6.15 -2.725,-5.9 ; -2.775,-5.294 -2.725,-5.344 ; -2.725,-10 -3.3,-10 -3.825,-9.475 -9.5,-9.475 -10.075,-10.05 -10.075,-10.75 -9.4,-11.425 -9.375,-11.4 -7.475,-11.4 -6.975,-10.9 -2.15,-10.9 -1.062,-9.813 ; -2.625,-5.275 -2.4,-5.275 -1.75,-5.925 -0.625,-5.925 0.55,-4.75 1.3,-4.75 1.75,-5.2 1.75,-5.75 -0.675,-8.175 -0.675,-9.025 2.775,-9.025 2.763,-9.012 3.1,-8.675 3.1,-6.95 ; -1.45,-10.15 -1.425,-10.15 -0.7,-9.425 ; -0.725,-9.45 -0.65,-9.45 ; -0.688,-9.112 -0.675,-9.125 ; -0.65,-9.425 -0.65,-9.125 ; 2.7,-4.425 2.7,-4.15 ; 2.9,-6.9 3.037,-7.037 ; 8.725,0.05 8.8,0.05 ; 8.75,4.1 14.3,9.65 ; 14.3,9.7 14.45,9.7 14.875,10.125 25.35,10.125 ; -1.225,-10 -1.225,-10
  lines w0.3: -3.302,-32.956 -3.175,-32.829
  lines w0.4: -3.825,-3.975 -3.175,-3.325 -3.175,3.15 -3.062,3.263 ; -3.05,3.275 2.65,3.275 3.35,3.975 ; -2.923,-3.425 -2.169,-3.425 ; -2.15,-3.425 1.867,-3.425 2.056,-3.506 2.7,-4.15 ; 2.9,-6.9 2.9,-4.275 9.025,-4.275 10.05,-5.3 10.05,-8.375 9.625,-8.8 8.35,-8.8 5.775,-6.225 3.825,-6.225 3.1,-6.95 ; 3.375,4.1 8.75,4.1 ; 8.725,0.05 8.725,4.025 ; 8.8,0.05 9.55,-0.7 9.55,-4 9.225,-4.325
gnd (plane layer: these items are gaps in the copper):
  rectangle: -3.5,-3.5 3.5,3.5
  lines w0.3: -21.971,-32.956 -17.15,-32.956

## Silkscreen, mask and mechanical layers (free items; w line width, h text height)
Top Overlay:
  region: 2.582,-15.815 4.362,-16.258 2.527,-16.258 cw(c4.499,-16.275)
  region: 3.918,-14.478 4.362,-16.258 4.362,-14.424 ccw(c4.379,-16.396)
  region: 2.932,-15.109 4.362,-16.258 2.704,-15.472 cw(c4.41,-16.289)
  region: 3.549,-14.613 ccw(c4.333,-16.213) 3.209,-14.831 4.362,-16.258
  region: 6.742,-16.258 7.239,-16.258 7.239,-14.852 7.589,-14.852 7.589,-14.444 6.391,-14.444 6.391,-14.852 6.742,-14.852 6.742,-15.089
  region: 4.481,-15.55 5.138,-16.256 5.691,-16.256 4.954,-15.355 5.687,-14.442 5.118,-14.442 4.481,-15.146 4.481,-15.55
  region: 6.272,-14.444 5.775,-14.444 5.775,-16.256 6.272,-16.256
  region: 13.457,-23.525 -2.157,-23.525 -2.157,-17.324 13.457,-17.324
  text "ASTROPIX carrier / N. Striebig / Okt. 2020" at 2.7,-14.1 h1.52
  text "POW4" at -21.925,-15.064 h1
  text "POW5" at -18.125,-15.064 h1
  text "ADL" at 8.65,-15.9 h1.52
  text "VDD" at -11.774,-16.225 h1
  text "Karlsruhe Institute of Technology" at 2.527,-16.804 h0.39
  text "VSSA" at -17.958,-23.614 h1
  text "POW6" at -14.5,-23.689 h1
  text "VDD18" at -21.974,-23.714 h1
Mechanical 1:
  lines w0.1: -14.465,-25.527 cw(c-13.515,-25.527) -12.565,-25.527 ; -14.465,-25.506 -14.465,-32.456 -14.965,-32.956 -25.165,-32.956 -25.665,-32.456 -25.665,-22.031 -25.665,26.675 25.625,26.675 25.625,-20.25 ; -12.565,-25.506 -12.565,-32.456 -12.065,-32.956 25.135,-32.956 25.635,-32.456 ; 25.625,-20.25 25.625,-20.25